# Altium PCB PCB1.PcbDoc
Units mil, origin at the board's own origin, x right, y up, seen from the top; angles counter-clockwise.
Board outline 6155 x 5830 mil, 2 copper layers (Top Layer, Bottom Layer); 66 components, 58 nets, 222 pads, 46 vias.
Unrouted connection lines stored in the file: 2.
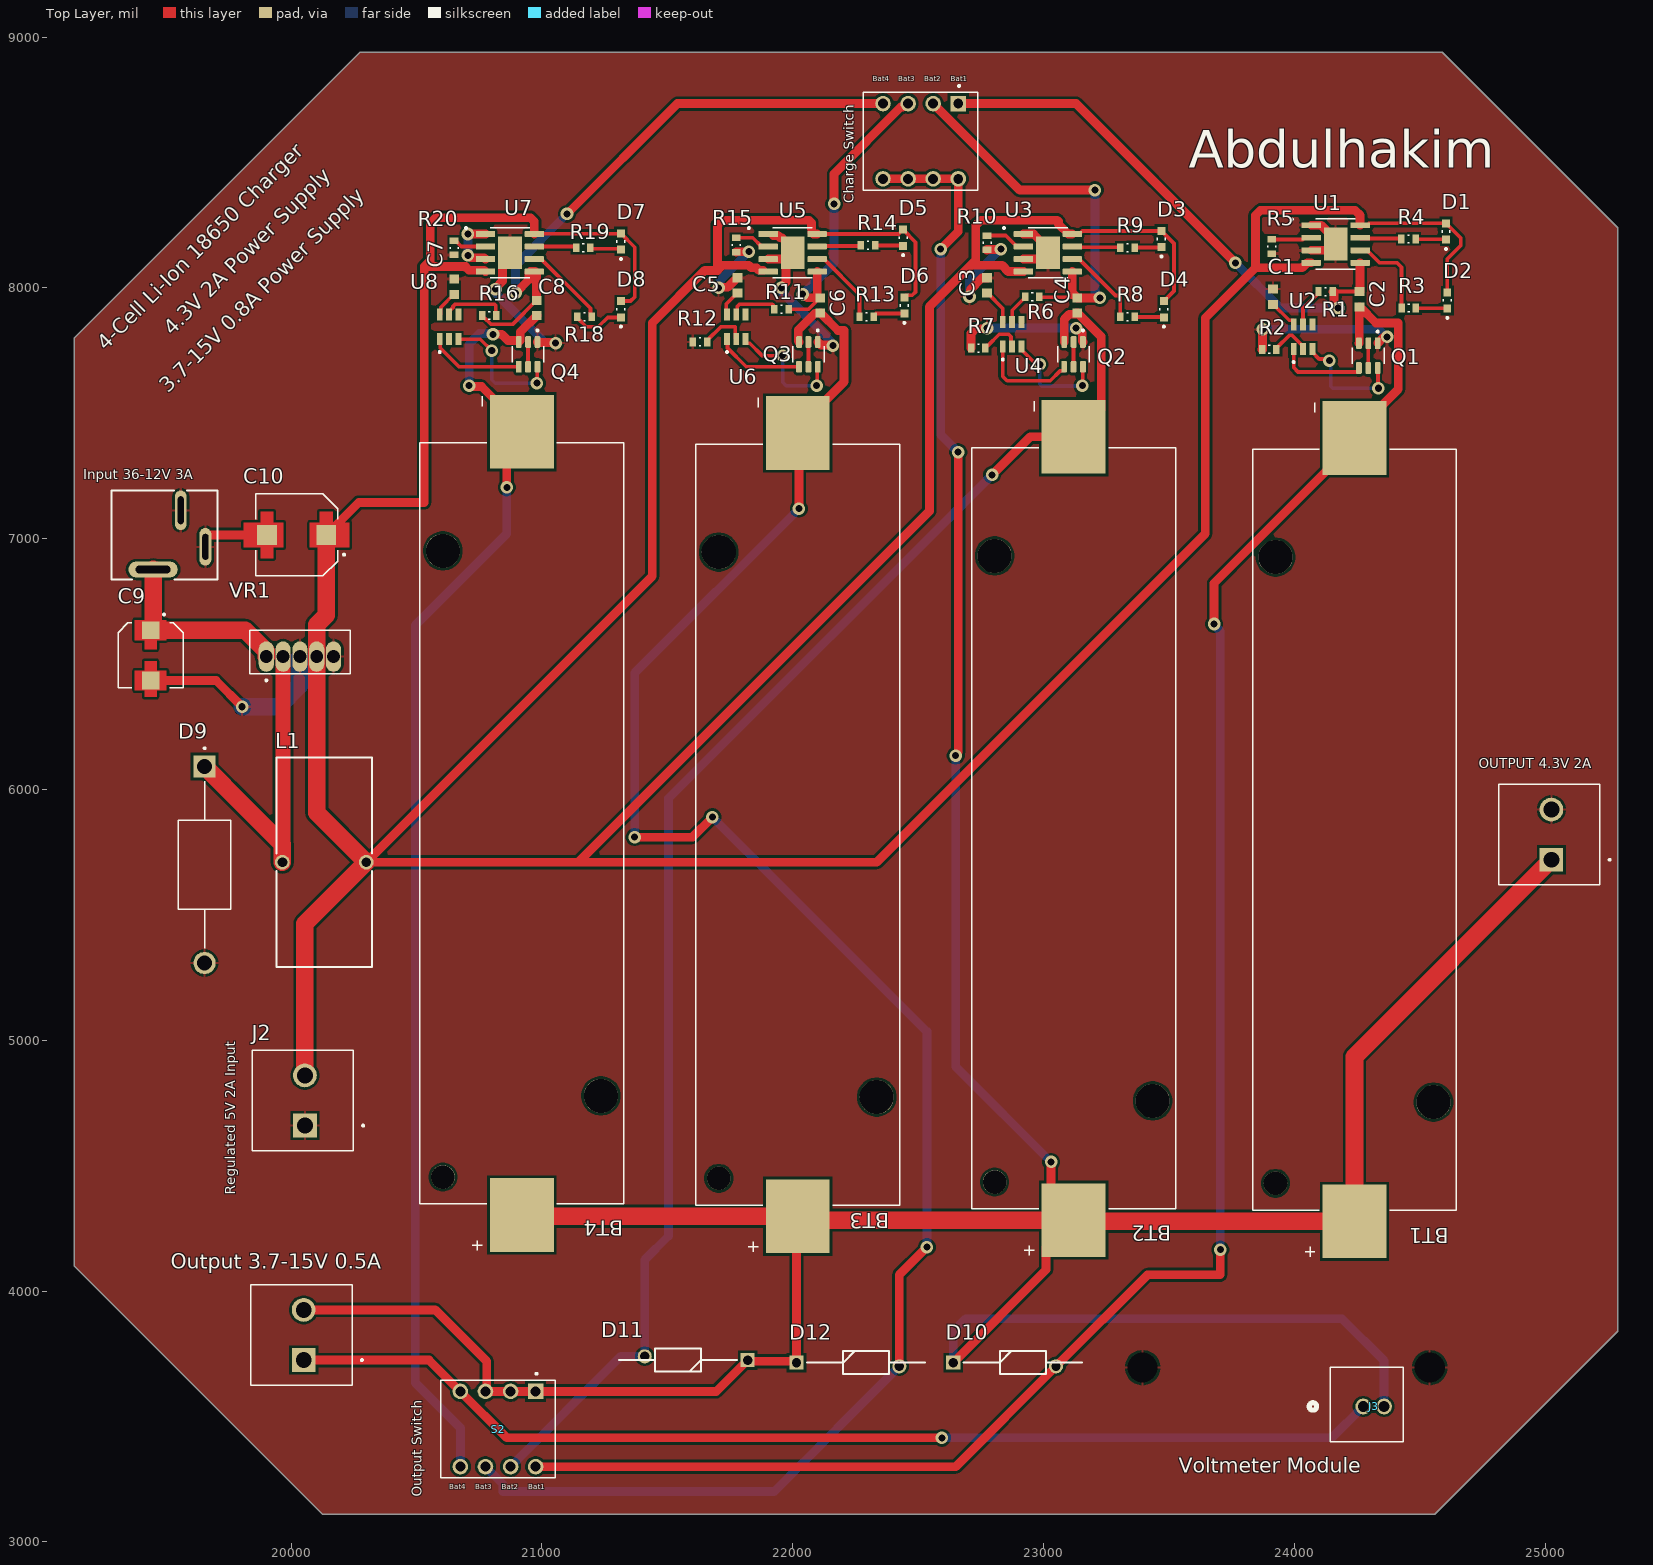
[diagram p0: Top Layer view]
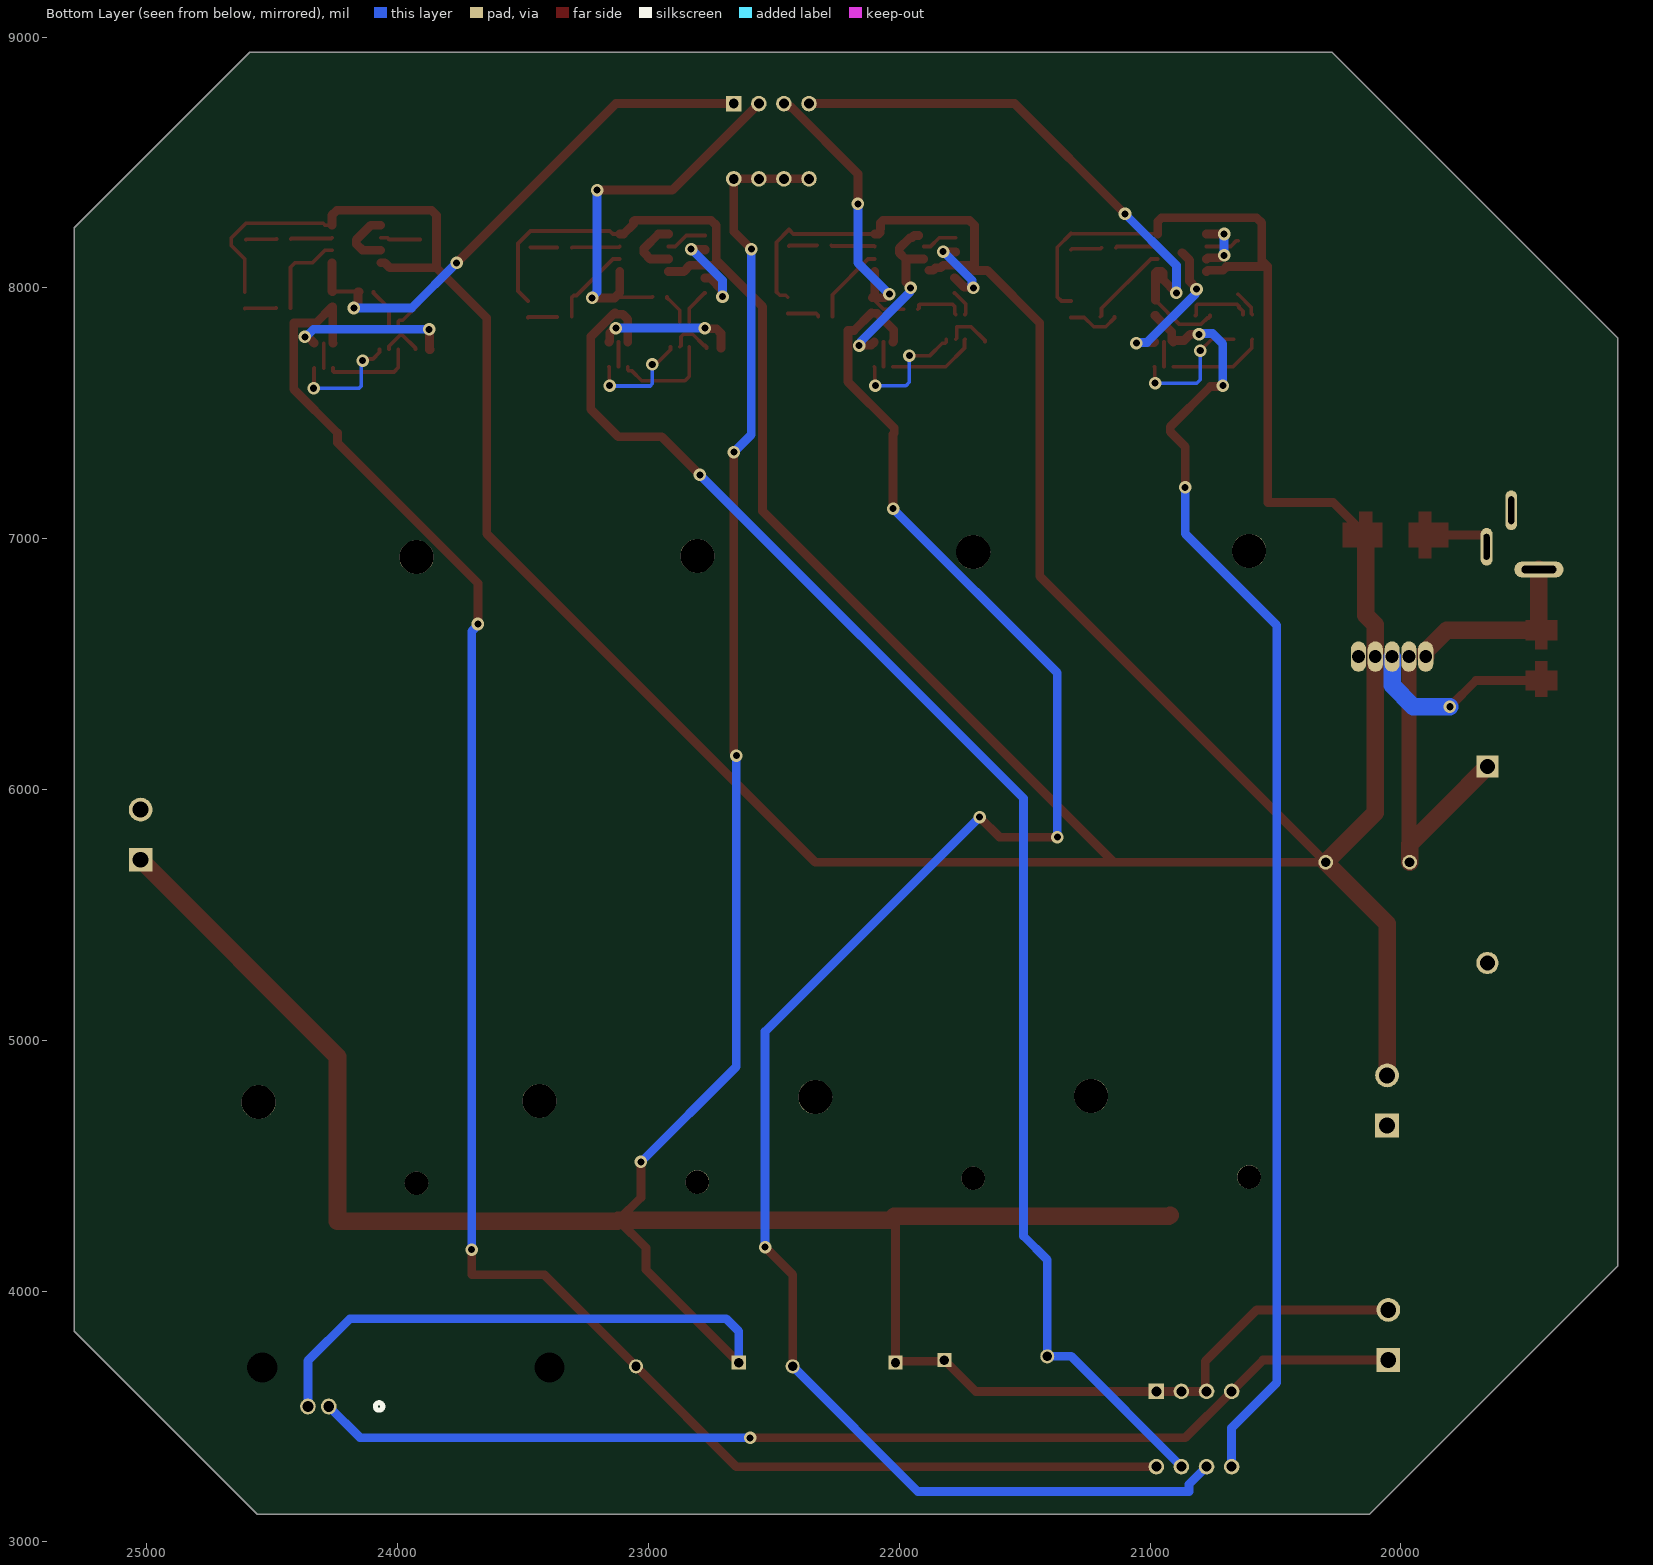
[diagram p1: Bottom Layer view, seen from below]
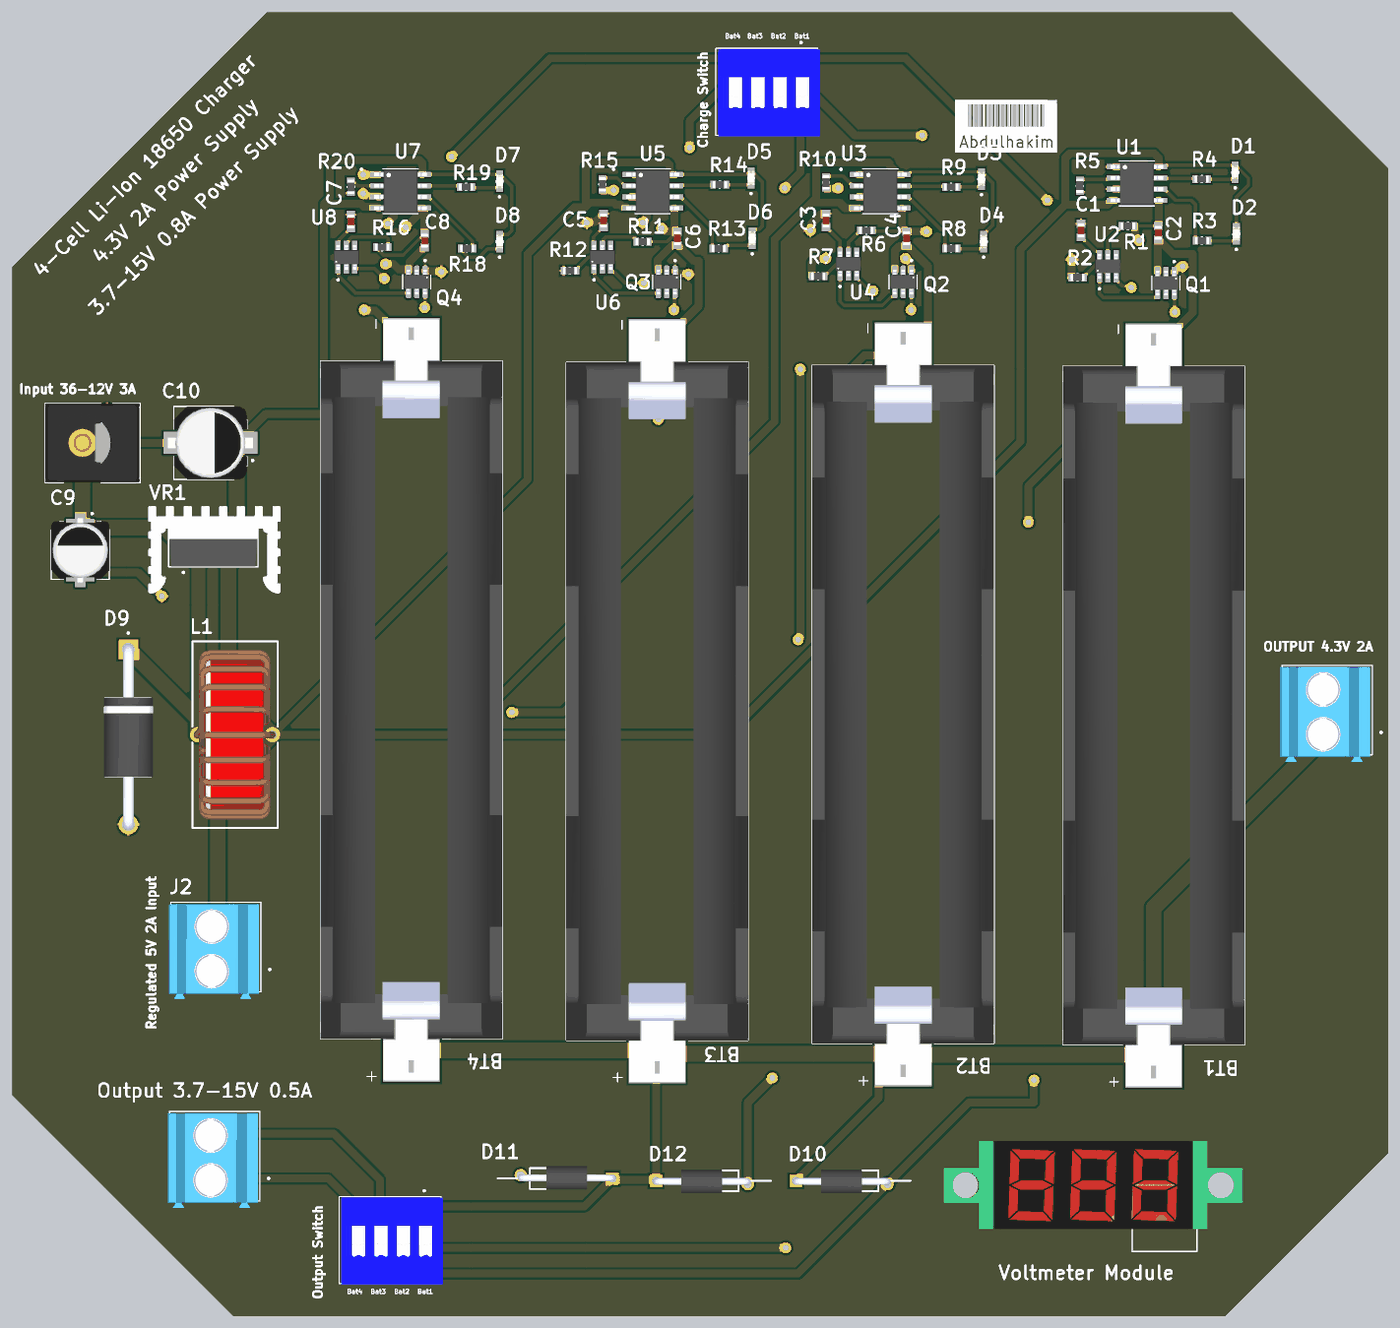
[diagram p2: 3D render of the assembled board from above, using the file's embedded part models]

## Layer stack, top to bottom
Top Solder: solder mask 0.4, Solder Resist, Dk 3.5
Top Layer: signal copper 1.4
Dielectric 1: dielectric 12.6, FR-4, Dk 4.8
Bottom Layer: signal copper 1.4
Bottom Solder: solder mask 0.4, Solder Resist, Dk 3.5

## Board outline
19135,4100 20125,3110 24560,3110 25290,3840 25290,8240 24590,8940 20275,8940 19135,7800

## Design rules (kind name [scope] priority, off if disabled: settings)
Clearance [All] p1: gap=10 ignorepadtopadclearanceinfootprint=FALSE
ComponentClearance [All] p1 off: gap=10 collisioncheckmode=3 verticalgap=10 showdistances=FALSE
PolygonConnect [All] p1: connectstyle=Relief reliefconductorwidth=10 reliefentries=4 polygonreliefangle="90 Angle" airgapwidth=10
RoutingVias [All] p1: holewidth=28 width=50 viastyle="Through Hole" minholewidth=28 minwidth=50 maxholewidth=28 maxwidth=50
SolderMaskExpansion [All] p1: expansion=4 istentingtop=FALSE
SupplyNets "Schematic Supply Nets_2" [InNet('VCC')] p1: voltage=0.000
SupplyNets "Schematic Supply Nets_1" [InNet('+5')] p2: voltage=0.000
SupplyNets "Schematic Supply Nets" [InNet('GND')] p3: voltage=0.000
Width [All] p1: maxlimit=100 minlimit=15 preferedwidth=35 minimp=50.000000 maximp=50.000000 favimp=50.000000
29 further rules are at their usual default settings.

## Classes and differential pairs
component class Sheet2: BT1 BT2 BT3 BT4 C9 C10 D9 D10 D11 D12 J1 J2 J4 J5 L1 S1 S2 Voltmeter VR1
component class Sheet1: C1 C2 C3 C4 C5 C6 C7 C8 D1 D2 D3 D4 D5 D6 D7 D8 Q1 Q2 Q3 Q4 R1 R2 R3 R4 R5 R6 R7 R8 R9 R10 R11 R12 R13 R14 R15 R16 R18 R19 R20 U1 U2 U3 U4 U5 U6 U7 U8

## Components (designator, comment, footprint, x,y, rotation, side; value= is the part's Value field where it differs from the comment)
BT1 "1042" BAT_1042 24240,5840 r270 top
BT2 "1042" BAT_1042 23120,5845 r270 top
BT3 "1042" BAT_1042 22020,5860 r270 top
BT4 "1042" BAT_1042 20920,5865 r270 top
C1 "100nF" CAPC1608X90N 23915,7965 r90 top
C2 "10uF" CAPC1608X90N 24260,7955 r90 top
C3 "100nF" CAPC1608X90N 22775,8010 r90 top
C4 "10uF" CAPC1608X90N 23135,7930 r90 top
C5 "100nF" CAPC1608X90N 21780,8010 r90 top
C6 "10uF" CAPC1608X90N 22110,7930 r90 top
C7 "100nF" CAPC1608X90N 20650,8005 r90 top
C8 "10uF" CAPC1608X90N 20980,7920 r90 top
C9 "100uF" CAP_EEEFKV101XAV 19440,6535 r270 top
C10 "1000uH" CAP_EEEFK0J102AV 20021.89,7015 r180 top
"Charge Switch" "DIP1" SW_DS01C-254-L-04BE 22510,8585 r180 top (schematic designator S1)
D1 "Red" LED_SML-D12U1WT86 24605,8225 r90 top
D2 "Green" LED_SML-D12FWT86 24610,7950 r90 top
D3 "Red" LED_SML-D12U1WT86 23470,8195 r90 top
D4 "Green" LED_SML-D12FWT86 23480,7915 r90 top
D5 "Red" LED_SML-D12U1WT86 22440,8200 r90 top
D6 "Green" LED_SML-D12FWT86 22445,7930 r90 top
D7 "Red" LED_SML-D12U1WT86 21315,8185 r90 top
D8 "Green" LED_SML-D12FWT86 21315,7915 r90 top
D9 "1N5822" DIOAD1990W125L900D530 19655,5700 r270 top
D10 "1N5819-G" DIOAD1405W75L465D235 22640,3715 r0 top
D11 "1N5819-G" DIOAD1405W75L465D235 21820,3725 r180 top
D12 "1N5819-G" DIOAD1405W75L465D235 22015,3715 r0 top
"Input 36-12V 3A" "694106402002" 694106402002 19495,7015 r90 top (schematic designator J1)
J2 "Regulated 5V" CUI_TB007-508-02BE 20055,4660 r90 top
J3 "393570002" CONN_393570002_MOL 24220,3540 r0 top (schematic designator Voltmeter)
L1 "100uH" WE-SI_744132 20132.32,5710 r0 top
"Output 3.7-15V 0.5A" "OUT 3.7-15V 0.5A" CUI_TB007-508-02BE 20050,3725 r90 top (schematic designator J4)
"OUTPUT 4.3V 2A" "OUTPUT 5V 2A" CUI_TB007-508-02BE 25025,5720 r90 top (schematic designator J5)
Q1 "FS8205" SOT95P280X145-6N#1 24295,7730 r270 top
Q2 "FS8205" SOT95P280X145-6N#1 23120,7735 r270 top
Q3 "FS8205" SOT95P280X145-6N#1 22062.6,7735 r270 top
Q4 "FS8205" SOT95P280X145-6N#1 20945,7735 r270 top
R1 "100" RES_ERJ3EKF4703V 24125,7985 r0 top
R2 "1k" RES_ERJ3EKF4703V 23900,7755 r0 top
R3 "1k" RES_ERJ3EKF4703V 24456.46,7920 r0 top
R4 "1k" RES_ERJ3EKF4703V 24455,8195 r0 top
R5 "1.2k" RES_ERJ3EKF4703V 23910,8165 r90 top
R6 "100" RES_ERJ3EKF4703V 22955,7965 r0 top
R7 "1k" RES_ERJ3EKF4703V 22740,7760 r0 top
R8 "1k" RES_ERJ3EKF4703V 23335,7885 r0 top
R9 "1k" RES_ERJ3EKF4703V 23335,8160 r0 top
R10 "1.2k" RES_ERJ3EKF4703V 22775,8180 r90 top
R11 "100" RES_ERJ3EKF4703V 21955,7915 r0 top
R12 "1k" RES_ERJ3EKF4703V 21630,7785 r0 top
R13 "1k" RES_ERJ3EKF4703V 22295,7885 r0 top
R14 "1k" RES_ERJ3EKF4703V 22300,8170 r0 top
R15 "1.2k" RES_ERJ3EKF4703V 21775,8171.46 r90 top
R16 "100" RES_ERJ3EKF4703V 20790,7890 r180 top
R18 "1k" RES_ERJ3EKF4703V 21170,7885 r180 top
R19 "1k" RES_ERJ3EKF4703V 21165,8160 r0 top
R20 "1.2k" RES_ERJ3EKF4703V 20650,8160 r90 top
S2 "DIP2" SW_DS01C-254-L-04BE 20825,3450 r180 top
U1 "TP4056" SOP127P600X175-9N 24165,8175 r0 top
U2 "DW01A" SOT95P280X145-6N#2 24035,7805 r90 top
U3 "TP4056" SOP127P600X175-9N 23017.56,8140 r0 top
U4 "DW01A" SOT95P280X145-6N#2 22875,7815 r90 top
U5 "TP4056" SOP127P600X175-9N 22000,8140 r0 top
U6 "DW01A" SOT95P280X145-6N#2 21775,7845 r90 top
U7 "TP4056" SOP127P600X175-9N 20872.44,8140 r0 top
U8 "DW01A" SOT95P280X145-6N#2 20630,7845 r90 top
VR1 "LM2576-5.0WT" TO170P1016X444X1572-5 20035,6530 r0 top

## Footprints (in the part's own frame and the unit in brackets; to place one, negate y for a bottom-side part, rotate by r counter-clockwise, add the part's x,y. Pads: shape width x height; smd on the part's side, far side on the other; paste and mask are expansions set on the pad)
694106402002 [mm] "DC Power Jack Vertical THT ?6.4"
  oval 1.6x5 hole 0.8 slot 3.5 at 90 deg: 1(-3.5,1.15)
  oval 3.8x1.2 hole 0.6 slot 2.6 at 0 deg: 2(-1.2,-4.15)
  oval 4x1.2 hole 0.6 slot 2.8 at 0 deg: 3(2.5,-1.65)
  silkscreen extent -4.5,-5.35 4.5,5.35, body extent -4.5,-5.35 4.5,5.35, height 14.1
BAT_1042 [mm]
  rect 7.46x6.47 smd: N(-39.67,0) P(39.67,0)
  round 3.45 hole 3.45 unplated: ""(-27.6,-8) ""(27.6,8)
  round 2.39 hole 2.39 unplated: ""(35.82,-8)
  silkscreen extent -43.25,-10.32 43.25,10.32, body extent -43.23,-10.33 43.23,10.33, height 14.86
CAP_EEEFK0J102AV [mm]
  rect 2x2 smd paste-2 mask+0: 1(-3,0) 2(3,0)
  Top Layer region: -2.35,1.25 -1.35,1.25 -1.35,-1.25 -2.35,-1.25 -2.35,-2.35 -3.65,-2.35 -3.65,-1.25 -5.35,-1.25 -5.35,1.25 -3.65,1.25 -3.65,2.35 -2.35,2.35
  Top Layer region: 3.65,1.25 5.35,1.25 5.35,-1.25 3.65,-1.25 3.65,-2.35 2.35,-2.35 2.35,-1.25 1.35,-1.25 1.35,1.25 2.35,1.25 2.35,2.35 3.65,2.35
  silkscreen extent -4.9,-4.15 4.15,4.15, body extent -4.85,-4.15 4.85,4.15, height 10.5
CAP_EEEFKV101XAV [mm]
  rect 1.8x1.8 smd paste-2 mask+0: 1(-2.55,0) 2(2.55,0)
  Top Layer region: -1.55,0.6 -0.6,0.6 -0.6,-0.6 -1.55,-0.6 -1.55,-1.6 -3.55,-1.6 -3.55,-0.6 -4.2,-0.6 -4.2,0.6 -3.55,0.6 -3.55,1.6 -1.55,1.6
  Top Layer region: 3.55,0.6 4.2,0.6 4.2,-0.6 3.55,-0.6 3.55,-1.6 1.55,-1.6 1.55,-0.6 0.6,-0.6 0.6,0.6 1.55,0.6 1.55,1.6 3.55,1.6
  silkscreen extent -4.25,-3.3 3.3,3.3, body extent -3.65,-3.3 3.65,3.3, height 8
CAPC1608X90N [mm]
  rect 0.92x0.98 smd: 1(-0.775,0) 2(0.775,0)
  body extent -0.8,-0.41 0.8,0.41, height 0.9
CONN_393570002_MOL [mil]
  round 63 hole 43: 1(55,0) 2(138,0)
  silkscreen extent -161,-141 214,156, body extent -919,-42 419,352, height 276
CUI_TB007-508-02BE [mm]
  rect 2.4x2.4 / inner round 2.4 / far side rect 2.4x2.4 hole 1.6: 1(0,0)
  round 2.4 hole 1.6: 2(5.08,0)
  silkscreen extent -2.54,-6 7.62,5.35, body extent -3.35,-4.66 7.41,5.59, height 14
DIOAD1405W75L465D235 [mm]
  rect 1.425x1.425 / inner round 1.425 / far side rect 1.425x1.425 hole 0.95 mask+0.102: 1(0,0)
  round 1.425 hole 0.95 mask+0.102: 2(10.414,-0.381)
  silkscreen extent 1.06,-1.18 13.04,1.18, body extent -0.37,-1.43 10.78,1.27, height 2.7
DIOAD1990W125L900D530 [mm]
  round 2.25 hole 1.5 mask+0.102: A(9.95,0)
  rect 2.25x2.25 / inner round 2.25 / far side rect 2.25x2.25 hole 1.5 mask+0.102: C(-9.95,0)
  silkscreen extent -11.9,-2.65 8.47,2.65, body extent -10.58,-2.78 10.58,2.79, height 5.6
LED_SML-D12FWT86 [mm]
  rect 0.8x0.8 smd: A(0.825,0) C(-0.825,0)
  silkscreen extent -1.86,-0.4 0.11,0.4, body extent -0.8,-0.4 0.8,0.4, height 0.55
LED_SML-D12U1WT86 [mm]
  rect 0.8x0.8 smd: A(0.825,0) C(-0.825,0)
  silkscreen extent -1.86,-0.4 0.11,0.4, body extent -0.8,-0.4 0.8,0.4, height 0.55
RES_ERJ3EKF4703V [mm]
  rect 0.65x0.9 smd: 1(-0.725,0) 2(0.725,0)
  silkscreen extent -0.08,-0.4 0.08,0.4, body extent -0.8,-0.4 0.8,0.4, height 0.45
SOP127P600X175-9N [mm]
  rrect25% 1.97x0.6 smd: 1(-2.475,1.905) 2(-2.475,0.635) 3(-2.475,-0.635) 4(-2.475,-1.905) 5(2.475,-1.905) 6(2.475,-0.635) 7(2.475,0.635) 8(2.475,1.905)
  rect 2.413x3.302 smd paste-3: 9(0,0)
  silkscreen extent -4.54,-2.55 2,2.6, body extent -3,-2.45 3,2.45, height 1.75
SOT95P280X145-6N#1 [mm]
  rrect50% 1.21x0.59 smd: 1(-1.255,0.95) 2(-1.255,0) 3(-1.255,-0.95) 4(1.255,-0.95) 5(1.255,0) 6(1.255,0.95)
  silkscreen extent -2.53,-1.6 0.8,1.6, body extent -1.4,-1.45 1.4,1.45, height 1.45
SOT95P280X145-6N#2 [mm]
  rect 1.21x0.59 smd: 1(-1.255,0.95) 2(-1.255,0) 3(-1.255,-0.95) 4(1.255,-0.95) 5(1.255,0) 6(1.255,0.95)
  silkscreen extent -2.65,0.85 -2.46,1.05, body extent -1.4,-1.45 1.4,1.45, height 1.45
SW_DS01C-254-L-04BE [mm]
  rect 1.58x1.58 / inner round 1.58 / far side rect 1.58x1.58 hole 1: 1A(-3.81,-3.81)
  round 1.58 hole 1: 1B(-3.81,3.81) 2A(-1.27,-3.81) 2B(-1.27,3.81) 3A(1.27,-3.81) 3B(1.27,3.81) 4A(3.81,-3.81) 4B(3.81,3.81)
  silkscreen extent -5.79,-5.7 5.79,4.95, body extent -6.04,-4.83 5.54,5.07, height 7.72
TO170P1016X444X1572-5 [mm]
  oval 1.54x3.08 hole 1.29: 1(-3.4,0) 2(-1.7,0) 3(0,0) 4(1.7,0) 5(3.4,0)
  silkscreen extent -5.08,-2.5 5.08,2.69, body extent -7.38,-4.83 7.62,5.17, height 16.44
WE-SI_744132 [mm]
  round 1.508 hole 1: 1(-4.25,0) 2(4.25,0)
  silkscreen extent -4.85,-10.6 4.85,10.6, body extent -4.7,-9.67 4.6,9.65, height 22.36

## Part data
BT1 BT2 BT3 BT4: "SMT Holder for 18650 Battery", Package="NON STANDARD-5 Keystone", Check_prices=https://www.snapeda.com/parts/1042/Keystone/view-part/?ref=eda, MF="Keystone Electronics Corp.", MP=1042, SnapEDA_Link=https://www.snapeda.com/parts/1042/Keystone/view-part/?ref=snap
C1 C2 C3 C4 C5 C6 C7 C8: library part 0603YC104KAZ2A, "Capacitor MLCC 0603 100nF 16V", Package="1608 AVX", Check_prices=https://www.snapeda.com/parts/0603YC104KAZ2A/AVX/view-part/?ref=eda, MF=AVX, MP=0603YC104KAZ2A, SnapEDA_Link=https://www.snapeda.com/parts/0603YC104KAZ2A/AVX/view-part/?ref=snap
C9: library part EEEFKV101XAV, "CAP ALUM 100UF 20% 35V SMD", Package="RADIAL-2 Panasonic", Availability="In Stock", Check_prices=https://www.snapeda.com/parts/EEEFKV101XAV/Panasonic/view-part/?ref=eda, MF=Panasonic, MP=EEEFKV101XAV, Price=None, Purchase-URL=https://pricing.snapeda.com/search/part/EEEFKV101XAV/?ref=eda, SnapEDA_Link=https://www.snapeda.com/parts/EEEFKV101XAV/Panasonic/view-part/?ref=snap
C10: library part EEEFK0J102AV, "CAP ALUM 1000UF 20% 6.3V SMD", Package="RADIAL-2 Panasonic", Availability="In Stock", Check_prices=https://www.snapeda.com/parts/EEEFK0J102AV/Panasonic/view-part/5793315/?ref=eda, MF=Panasonic, MP=EEEFK0J102AV, Price=None, Purchase-URL=https://pricing.snapeda.com/search/part/EEEFK0J102AV/?ref=eda, SnapEDA_Link=https://www.snapeda.com/parts/EEEFK0J102AV/Panasonic/view-part/5793315/?ref=snap
"Charge Switch" S2: library part DS01C-254-L-04BE, "4 Position, Through Hole, 2.54 mm Pitch, Raised Slide Actuator, Convex Bottom, Long Pin, DIP Switch", Package=None, Check_prices=https://www.snapeda.com/parts/DS01C-254-L-04BE/Same+Sky/view-part/?ref=eda, MF="Same Sky", MP=DS01C-254-L-04BE, SnapEDA_Link=https://www.snapeda.com/parts/DS01C-254-L-04BE/Same+Sky/view-part/?ref=snap
D1 D3 D5 D7: library part SML-D12U1WT86, "Red 620nm LED Indication - Discrete 2.2V 0603 (1608 Metric)", Package="0603 Rohm", Availability="In Stock", Check_prices=https://www.snapeda.com/parts/SML-D12U1WT86/Rohm/view-part/?ref=eda, MF=Rohm, MP=SML-D12U1WT86, Price=None, Purchase-URL=https://pricing.snapeda.com/search?q=SML-D12U1WT86&ref=eda, SnapEDA_Link=https://www.snapeda.com/parts/SML-D12U1WT86/Rohm/view-part/?ref=snap
D2 D4 D6 D8: library part SML-D12FWT86, "Green 565nm LED Indication - Discrete 2.2V 0603 (1608 Metric)", Package="0603 Rohm", Availability="In Stock", Check_prices=https://www.snapeda.com/parts/SML-D12FWT86/Rohm/view-part/?ref=eda, MF=Rohm, MP=SML-D12FWT86, Price=None, Purchase-URL=https://pricing.snapeda.com/search/part/SML-D12FWT86/?ref=eda, SnapEDA_Link=https://www.snapeda.com/parts/SML-D12FWT86/Rohm/view-part/?ref=snap
D9: "3A, 40V, DÃ¼zlemsel Schottky", Package="DO-201AD Taiwan Semiconductor", Check_prices=https://www.snapeda.com/parts/1N5822/taiwan/view-part/?ref=eda, MF="Taiwan Semiconductor", MP=1N5822, SnapEDA_Link=https://www.snapeda.com/parts/1N5822/taiwan/view-part/?ref=snap
D10 D11 D12: "Diode,Schottky Barrier,Vr 40V,If 1A,Pkg CASE 59-10,Vf 0.6V,Tj +125degc,Cs 25A", Package="DO-41 onsemi", Check_prices=https://www.snapeda.com/parts/1N5819G/Onsemi/view-part/?ref=eda, MF="ON Semiconductor", MP=1N5819G, SnapEDA_Link=https://www.snapeda.com/parts/1N5819G/Onsemi/view-part/?ref=snap
"Input 36-12V 3A": library part CMP-1502-00189-3, "DC Power Jack Connector WR-DC, Male, Vertical, THT, 3 A, 20 V", Color=Black, Current Rating=3A, Flammability Rating="UL94 V-0", Insulation Resistance=100MΩ, Max Operating Temperature=85°C, Min Operating Temperature=-40°C, Operating Supply Voltage=20V, Voltage Rating=30V, Connector Type=Power, Contact Gender=Female, Contact Material=Gold, Contact Plating=Tin, Gender=Male, Height=14.3mm, Housing Material=Polyamide, Mount="Through Hole", Number of Contacts=1, Orientation=Vertical, Packaging=Bulk, REACH SVHC=Unknown, RoHS=Compliant, Shielding=Unshielded, Termination="Through Hole", Voltage Rating (DC)=20V
J2: library part TB007-508-02BE, "2 Position Wire to Board Terminal Block Horizontal with Board 0.200 (5.08mm) Through Hole", Package=None, Check_prices=https://www.snapeda.com/parts/TB00750802BE/Same+Sky/view-part/?ref=eda, MF="Same Sky", MP=TB00750802BE, SnapEDA_Link=https://www.snapeda.com/parts/TB00750802BE/Same+Sky/view-part/?ref=snap
J3: "TB, WIRE TO BRD, 2POS, 16AWG; Pitch Spacing:3.5mm; No. of Positions:2Ways; Wire Size AWG Min:28AWG; Wire Size AWG Max:16AWG; Conductor Area CSA:1mmÂ²; Wire Connection Method:Screw; Rated Current:17.5A; Rated Voltage:300V; Block Orientation:Through Hole Ri", Package=None, Check_prices=https://www.snapeda.com/parts/393570002/Molex/view-part/?ref=eda, MF=Molex, MP=393570002, SnapEDA_Link=https://www.snapeda.com/parts/393570002/Molex/view-part/?ref=snap
L1: library part WE-SI, "L = 49 ÂµH ; IR = 5.8 A; Isat = 2.2 A; RDC = 0.05 â„", Package=None, Check_prices=https://www.snapeda.com/parts/744132/Wurth+Electronics/view-part/?ref=eda, MF="Wurth Elektronik", MP=744132, SnapEDA_Link=https://www.snapeda.com/parts/744132/Wurth+Electronics/view-part/?ref=snap
"Output 3.7-15V 0.5A" "OUTPUT 4.3V 2A": library part TB007-508-02BE, "2~24 Poles, Screw Type, Horizontal, 5.08 Pitch, 24~12 (AWG), Terminal Block Connector", Package=None, Check_prices=https://www.snapeda.com/parts/TB007-508-02BE/Same+Sky/view-part/?ref=eda, MF="Same Sky", MP=TB007-508-02BE, SnapEDA_Link=https://www.snapeda.com/parts/TB007-508-02BE/Same+Sky/view-part/?ref=snap
Q1 Q2 Q3 Q4: "ÐœÐžÐŸ-Ñ‚Ñ€Ð°Ð½Ð·Ð¸ÑÑ‚Ð¾Ñ€ Ñ Ð´Ð²Ð¾Ð¹Ð½Ñ‹Ð¼ N-ÐºÐ°Ð½Ð°Ð»ÑŒÐ½Ñ‹Ð¼ Ñ€ÐµÐ¶Ð¸Ð¼Ð¾Ð¼ ÑƒÑÐ¸Ð»ÐµÐ½Ð¸Ñ Ð¼Ð¾Ñ‰Ð½Ð¾ÑÑ‚Ð¸", Package=Package, Check_prices=https://www.snapeda.com/parts/FS8205/Fortune+Semiconductor/view-part/?ref=eda, MF="Fortune Semiconductor", MP=FS8205, SnapEDA_Link=https://www.snapeda.com/parts/FS8205/Fortune+Semiconductor/view-part/?ref=snap
R1 R2 R3 R4 R5 R6 R7 R8 R9 R10 R11 R12 R13 R14 R15 R16 R18 R19 R20: library part ERJ3EKF4703V, "RES, THICK FILM, 470K, 100mW, 1%, 0603RES, THICK FILM, 470K, 100mW, 1%, 0603, FULL REEL", Package="1608-2 Panasonic", Check_prices=https://www.snapeda.com/parts/ERJ-3EKF4703V/Panasonic+Electronic+Components/view-part/?ref=eda, MF=Panasonic, MP=ERJ-3EKF4703V, SnapEDA_Link=https://www.snapeda.com/parts/ERJ-3EKF4703V/Panasonic+Electronic+Components/view-part/?ref=snap
U1 U3 U5 U7: "Complete single cell Li-Ion battery with a constant current / constant voltage linear charger", Package=Package, Availability="Not in stock", Check_prices=https://www.snapeda.com/parts/TP4056/NanJing+Top+Power+ASIC+Corp./view-part/?ref=eda, MF="NanJing Top Power ASIC Corp.", MP=TP4056, Price=None, SnapEDA_Link=https://www.snapeda.com/parts/TP4056/NanJing+Top+Power+ASIC+Corp./view-part/?ref=snap
U2 U4 U6 U8: "One Cell Lithium-ion/Polymer Battery Protection IC", Package="SOT-23-6 Fortune Semiconductor", Check_prices=https://www.snapeda.com/parts/DW01A/Fortune+Semiconductor/view-part/?ref=eda, MF="Fortune Semiconductor", MP=DW01A, SnapEDA_Link=https://www.snapeda.com/parts/DW01A/Fortune+Semiconductor/view-part/?ref=snap
VR1: "Buck Switching Regulator IC Positive Fixed 5V 1 Output 3A TO-220-5", Package="TO-220-5 Micrel", Check_prices=https://www.snapeda.com/parts/LM2576-5.0WT/Microchip/view-part/?ref=eda, MF="Microchip Technology", MP=LM2576-5.0WT, SnapEDA_Link=https://www.snapeda.com/parts/LM2576-5.0WT/Microchip/view-part/?ref=snap

## Free pads (board coordinates)
  round 60 hole 120: 2(24540,3695) 3(23395,3695)

## Via types
v1: diameter 50, hole 28, Top Layer to Bottom Layer, 46 vias

## Nets (pads, with @x,y where several pads share a name; then routed paths per layer and width w, separated by ;. In a path a pad name is that pad's centre, name@x,y a point inside that pad or via, vN(x,y) a via of type N, cw(c..) or ccw(c..) an arc to the next point about the centre after c; other vN are vias at no path point)
+5: C10.1 D1.A D2.A D3.A D4.A D5.A D6.A D7.A D8.A J2.2 L1.2 U1.4 U1.8 U3.4 U3.8 U5.4 U5.8 U7.4 U7.8 VR1.4 | length 20938.7
  Top Layer w15: U7.8 20971.12,8216.24 21313.76,8216.24 D7.A 21370,8162.48 21370,7963.79 21353.69,7947.48 D8.A ; U5.8 22422.52,8215 D5.A 22490,8182.48 22490,7983.79 22476.94,7970.73 22453.25,7970.73 D6.A ; U3.8 23141.97,8215 23154.45,8227.48 D3.A 23520,8177.48 23520,7987.48 D4.A ; U1.8 24289.41,8250 24296.89,8257.48 D1.A 24663.79,8198.69 24663.79,8168.79 24610,8115 D2.A
  Top Layer w35: C10.1 20269.5,7144.5 20530.5,7144.5 20530.5,8085 ; U7.4 20769.31,8070.69 20709.31,8070.69 20695,8085 20530.5,8085 ; U7.8 20969.88,8264.88 20954.76,8280 20575.5,8280 20555,8259.5 20555,8109.5 20530.5,8085 ; 21145,5710 22545,7110 22545,7925 22710,8090 ; U5.4@21881.28,8070.69 21864.71,8070.69 21855.4,8080 21835,8080 21825,8090 21720,8090 21700,8070 ; U5.8 22081.85,8215 22076.16,8220.69 22076.16,8236.28 22075,8237.44 22075,8259.5 22064.5,8270 21720.5,8270 21700,8249.5 21700,8070 ; U3.4 22860,8065 22835,8090 22710,8090 ; U3.8 23099.41,8215 23060,8254.41 23060,8264.5 23054.5,8270 22750.5,8270 22730,8249.5 22730,8110 22710,8090 ; U1.4 24051.97,8100 24031.97,8080 23845,8080 ; U1.8 24262.44,8289.5 24241.94,8310 23865.5,8310 23845,8289.5 23845,8080 ; 21700,8070 21650,8070 21440,7860 21440,6850.35 L1.2 22335,5710 23645,7020 23645,7880 23845,8080
  Top Layer w70: J2.2 20055,5465.35 L1.2 20101.93,5907.72 VR1.4 20101.93,6656.93 20140,6695 C10.1
B1-: BT1.N C2.1 D10.2 Q1.3 S2.1B | length 7483.8
  Top Layer w35: S2.1B 22650,3300 D10.2 23415,4065 23704.5,4065 23704.5,4164.5 v1(23705,4165) ; v1(23680,6660) 23680,6822.32 24240,7382.32 BT1.N 24240,7421.3 24414.5,7595.8 24414.5,7860 24325.67,7860 24261.18,7924.49 C2.1 24259.41,7924.49 24258.8,7923.88 24258.8,7780.61 Q1.3
  Bottom Layer w35: v1(23680,6660) 23680,6655.94 23705,6630.94 v1(23705,4165)
B2-: BT2.N C4.1 D11.2 Q2.3 S2.2B | length 5924.8
  Top Layer w35: v1(22795,7255) 22946.81,7406.81 BT2.N 23229.86,7516.67 23229.86,7805.81 23136.79,7898.88 23135.61,7898.88 C4.1 23133.82,7899.49 23129.33,7895 23103.1,7895 23082.6,7874.5 Q2.3
  Bottom Layer w35: S2.2B 21315,3740 D11.2 21410,4125 21505,4220 21505,5965 v1(22795,7255)
B3-: BT3.N C6.1 D12.2 Q3.3 S2.3B | length 7506.8
  Top Layer w35: v1(21370,5810) 21600,5810 v1(21680,5890) ; v1(22025,7120) 22025,7416.81 BT3.N 22020,7441.3 22205,7626.3 22205,7830 22180.67,7830 22111.18,7899.49 C6.1 22109.39,7898.88 22088.88,7898.88 22022.1,7832.1 22022.1,7787.5 Q3.3 ; D12.2 22425,4065 v1(22535,4175)
  Bottom Layer w35: S2.3B 20845,3230 20845,3200.5 21925.5,3200.5 D12.2 ; v1(21370,5810) 21370,6465 v1(22025,7120) ; v1(21680,5890) 22535,5035 v1(22535,4175)
B4-: BT4.N C8.1 Q4.3 S2.4B | length 5206.3
  Top Layer w35: v1(20710,7610) 20712.87,7607.13 20759.17,7607.13 20920,7446.3 BT4.N 20860,7366.81 v1(20860,7205) ; v1(20805,7815) 20840,7815 20864.27,7790.73 20901.71,7790.73 20907.6,7784.84 Q4.3 20913.48,7790.3 20913.48,7824.15 20978.82,7889.49 C8.1
  Bottom Layer w35: S2.4B 20675,3455 20495,3635 20495,6655 20860,7020 v1(20860,7205) ; v1(20710,7610) 20710,7777.37 20750.5,7817.87 20802.13,7817.87 v1(20805,7815)
Batt1: "Charge Switch.1A" C2.2 R1.2 U1.5 | length 2152
  Top Layer w15: R1.2 24153.8,7985.26 24259.74,7985.26 C2.2
  Top Layer w35: 22660,8735 23130,8735 v1(23765,8100) ; R1.2 24158.03,7985 24158.25,7984.78 24158.25,7940.81 24175,7924.06 v1(24175,7920) ; C2.2 24261.18,7985.51 24262.44,7986.77 U1.5
  Bottom Layer w35: v1(23765,8100) 23945,7920 v1(24175,7920)
Batt2: "Charge Switch.2A" C4.2 R6.2 U3.5 | length 1575.4
  Top Layer w15: R6.2 22985.79,7962.76 C4.2@23132.76,7962.76
  Top Layer w35: 22560,8735 22905,8390 v1(23205,8390) ; U3.5 23115,7980.51 C4.2@23132.76,7962.76 ; C4.2@23135.51,7960 v1(23225,7960)
  Bottom Layer w35: v1(23205,8390) 23205,7984.06 23225,7964.06 v1(23225,7960)
Batt3: "Charge Switch.3A" C6.2 R11.2 U5.5 | length 1269.2
  Top Layer w15: R11.2 22063.31,7915 C6.2@22108.82,7960.51
  Top Layer w35: v1(22040,7975) 22044.06,7975 22057.94,7961.12 22108.21,7961.12 22097.44,7971.89 U5.5 ; v1(22165,8335) 22165,8455 22431.4,8721.4 22439.04,8721.4 22452.64,8735 22460,8735
  Bottom Layer w35: v1(22040,7975) 22165,8100 v1(22165,8335)
Batt4: "Charge Switch.4A" C8.2 R16.2 U7.5 | length 2362.3
  Top Layer w15: R16.2 20761.46,7885.08 20766.75,7879.78 20771.67,7879.78 20796.46,7855 20885,7855 20885,7856.69 C8.2@20978.82,7950.51
  Top Layer w35: v1(20895,7980) 20948.6,8033.6 20948.6,8059.31 20954.29,8065 U7.5 20972.52,8065 20978.21,8059.31 20978.21,7951.12 C8.2@20978.82,7950.51 ; v1(21100,8295) 21540,8735 22360,8735
  Bottom Layer w35: v1(20895,7980) 20895,8090 v1(21100,8295)
BV2: "Charge Switch.1B" "Charge Switch.2B" "Charge Switch.3B" "Charge Switch.4B" "Output 3.7-15V 0.5A.2" "OUTPUT 4.3V 2A.1" BT1.P BT2.P BT3.P BT4.P D10.1 D11.1 D12.1 J3.2 S2.1A S2.2A S2.3A | length 15476.4
  Top Layer w35: 20050,3925 20575,3925 20780,3720 20780,3605 S2.3A S2.2A S2.1A 21695,3600 D11.1 21825,3720 22010,3720 D12.1 22015,4263.19 BT3.P@22035,4283.19 ; 22360,8435 22460,8435 22560,8435 22660,8435 22660,8225 v1(22590,8155) ; D10.1 23010.14,4085.14 23010.14,4173.33 BT2.P 23030,4373.19 v1(23030,4515) ; v1(22650,6135) 22650,6139.06 22660,6149.06 v1(22660,7345)
  Top Layer w70: BT4.P 20925,4298.19 BT3.P ; BT3.P@22035,4283.19 BT2.P 23125,4278.19 BT1.P 24240,4935 25025,5720
  Bottom Layer w35: v1(22590,8155) 22590,7415 v1(22660,7345) ; D10.1 22640,3840 22690,3890 24190,3890 24358,3722 J3.2 ; v1(22650,6135) 22650,4895 v1(23030,4515)
GND: "Input 36-12V 3A.2" "Input 36-12V 3A.3" "OUTPUT 4.3V 2A.2" C1.2 C3.2 C5.2 C7.2 C9.2 C10.2 D9.A J2.1 pad.2 pad.3 Q1.1 Q2.1 Q3.1 Q4.1 R2.1 R5.1 R7.1 R10.1 R12.1 R15.1 R20.1 U1.1 U1.3 U1.9 U3.1 U3.3 U3.9 U5.1 U5.3 U5.9 U7.1 U7.3 U7.9 VR1.3 VR1.5 | length 5057.6
  Top Layer w35: C9.2 19700.39,6434.61 v1(19805,6330) ; 19658.39,6967.76 19658.39,7009.34 19664.04,7015 C10.2 ; v1(20705,8130) 20709.06,8130 20718.37,8120.69 20769.31,8120.69 U7.3 ; v1(20705,8215) U7.1 ; v1(20815,7995) 20815,7999.06 20842.44,8026.5 20842.44,8110 U7.9 ; Q4.1 20984.61,7782.2 21052.79,7782.2 v1(21055,7780) ; v1(21705,8000) 21707.87,8002.87 21741.18,8002.87 21778.82,8040.51 C5.2 ; R15.1 21775,8143.74 21775.22,8143.96 21823.96,8143.96 v1(21825,8145) ; U5.3 U5.9@21975,8115 ; U5.1@21923.84,8209.31 21940.41,8209.31 21949.72,8200 21957.5,8200 22000,8157.5 U5.9 21973.44,8113.44 21973.44,8022.5 21955,8004.06 v1(21955,8000) ; Q3.1 22100,7783.98 22105.89,7778.09 22106.32,7778.09 22111.54,7772.87 22157.13,7772.87 v1(22160,7770) ; v1(22705,7965) 22707.87,7967.87 22707.87,7992.87 22754.9,8039.9 22774.39,8039.9 C3.2 ; R7.1 22711.46,7819.5 22729.09,7837.13 22772.13,7837.13 v1(22775,7840) ; R10.1 22775,8153.01 22775.22,8153.23 22828.23,8153.23 v1(22830,8155) ; U3.3 22992.56,8115 U3.9 23017.56,8157.5 22960.06,8215 U3.1 ; v1(23130,7840) 23134.06,7840 23154.06,7820 23154.06,7787.75 Q2.1 ; R2.1 23873.01,7755 23873.23,7755.22 23873.23,7833.23 v1(23875,7835) ; U1.3 24140,8150 U1.9 24165,8192.5 24107.5,8250 U1.1 ; Q1.1 24332.4,7779.84 24354.69,7802.13 24367.13,7802.13 v1(24370,7805)
  Bottom Layer w35: v1(20705,8130) v1(20705,8215) ; v1(20815,7995) 20817.87,7992.13 20817.87,7977.13 21012.13,7782.87 21052.13,7782.87 v1(21055,7780) ; v1(21705,8000) 21710,8005 21710,8030 v1(21825,8145) ; v1(21955,8000) 21957.87,7997.13 21957.87,7982.13 22152.5,7787.5 22152.5,7781.56 22160,7774.06 v1(22160,7770) ; v1(22705,7965) 22705,8030 v1(22830,8155) ; v1(22775,7840) v1(23130,7840) ; v1(23875,7835) 24335.94,7835 24365.94,7805 v1(24370,7805)
  Bottom Layer w70: v1(19805,6330) 19950,6330 20035,6415 VR1.3
NetC1_1: C1.1 U2.6 | length 122.9
  Top Layer w15: C1.1 23916.18,7934.49 23979.94,7870.73 23993.48,7870.73 23997.6,7866.61 U2.6
NetC3_1: C3.1 U4.6 | length 141.7
  Top Layer w15: C3.1 22776.18,7979.49 22837.6,7918.07 U4.6
NetC5_1: C5.1 U6.6 | length 105.5
  Top Layer w15: U6.6 21735,7897.01 21735,7935.67 21778.82,7979.49 C5.1
NetC7_1: C7.1 U8.6 | length 104.5
  Top Layer w15: U8.6 20596.71,7898.52 20596.71,7922.38 20648.82,7974.49 C7.1
NetD1_C: D1.C R4.2 | length 122.5
  Top Layer w15: R4.2 24484.78,8193.76 24603.76,8193.76 D1.C
NetD2_C: D2.C R3.2 | length 126
  Top Layer w15: R3.2 24486.24,7918.76 24608.76,7918.76 D2.C
NetD3_C: D3.C R9.2 | length 107.5
  Top Layer w15: R9.2 23364.8,8161.26 23468.74,8161.26 D3.C
NetD4_C: D4.C R8.2 | length 117.5
  Top Layer w15: R8.2 23364.78,7883.76 23478.76,7883.76 D4.C
NetD5_C: D5.C R14.2 | length 112.5
  Top Layer w15: R14.2 22329.78,8168.76 22438.76,8168.76 D5.C
NetD6_C: D6.C R13.2 | length 129.5
  Top Layer w15: R13.2 22323.54,7889.92 22331.14,7897.52 D6.C
NetD7_C: D7.C R19.2 | length 124.6
  Top Layer w15: R19.2 21197.28,8156.26 21311.26,8156.26 D7.C
NetD8_C: D8.C R18.2 | length 208.5
  Top Layer w15: R18.2 21141.46,7880.08 21176.53,7845 21225,7845 21262.52,7882.52 D8.C
NetD9_C: D9.C L1.1 VR1.2 | length 1331.4
  Top Layer w60: L1.1 19968.07,5713.07 VR1.2
  Top Layer w70: D9.C 19814.65,5932.09 19965,5781.73 L1.1
NetJ3_1: "Output 3.7-15V 0.5A.1" J3.1 S2.4A | length 4405.2
  Top Layer w35: 20050,3725 20550,3725 S2.4A 20860,3415 v1(22595,3415)
  Bottom Layer w35: v1(22595,3415) 24150,3415 J3.1
NetQ1_2: Q1.2 Q1.5 | length 98.8
  Top Layer w15: Q1.5 Q1.2
NetQ1_4: Q1.4 U2.1 | length 353.6
  Top Layer w15: U2.1 23997.6,7682.4 24015,7665 24253.48,7665 24257.6,7669.11 Q1.4
NetQ1_6: Q1.6 U2.3 | length 472.2
  Top Layer w15: U2.3 24072.4,7743.39 24099.09,7716.7 24133.3,7716.7 v1(24140,7710) ; Q1.6 24333.7,7679.29 24333.7,7601.3 v1(24335,7600)
  Bottom Layer w15: v1(24140,7710) 24145,7705 24145,7608.79 24153.79,7600 v1(24335,7600)
NetQ2_2: Q2.2 Q2.5 | length 98.8
  Top Layer w15: Q2.5 Q2.2
NetQ2_4: Q2.4 U4.1 | length 400.6
  Top Layer w15: U4.1 22837.6,7647.4 22855,7630 23027.01,7630 23066.28,7669.27 23078.48,7669.27 23082.6,7673.39 Q2.4
NetQ2_6: Q2.6 U4.3 | length 437.1
  Top Layer w15: U4.3 22912.4,7753.39 22964.09,7701.7 22978.3,7701.7 v1(22985,7695) ; v1(23155,7610) 23156.2,7611.2 23156.2,7684.39 Q2.6
  Bottom Layer w15: v1(22985,7695) 22985,7617.63 22993.79,7608.85 23153.85,7608.85 v1(23155,7610)
NetQ3_2: Q3.2 Q3.5 | length 98.8
  Top Layer w15: Q3.5 Q3.2
NetQ3_4: Q3.4 U6.1 | length 352.6
  Top Layer w15: U6.1 21739.63,7793.56 21739.63,7760.37 21814.41,7685.59 Q3.4
NetQ3_6: Q3.6 U6.3 | length 506.5
  Top Layer w15: U6.3 21812.4,7783.39 21816.52,7779.27 21828.72,7779.27 21877.99,7730 v1(21960,7730) ; v1(22095,7610) 22097.5,7612.5 22097.5,7683.09 Q3.6
  Bottom Layer w15: v1(21960,7730) 21960,7623.79 21973.79,7610 v1(22095,7610)
NetQ4_2: Q4.2 Q4.5 | length 98.8
  Top Layer w15: Q4.5 Q4.2
NetQ4_4: Q4.4 U8.1 | length 380
  Top Layer w15: U8.1 20594.63,7793.56 20594.63,7760.37 20669.41,7685.59 Q4.4
NetQ4_6: Q4.6 U8.3 | length 520
  Top Layer w15: U8.3 20754.41,7795.59 v1(20800,7750) ; v1(20980,7620) 20981.2,7621.2 20981.2,7684.39 Q4.6
  Bottom Layer w15: v1(20800,7750) 20800,7633.79 20813.79,7620 v1(20980,7620)
NetR1_1: R1.1 U2.5 | length 156
  Top Layer w15: U2.5 24035,7918.62 24096.46,7980.08 R1.1
NetR2_2: R2.2 U2.2 | length 162.5
  Top Layer w15: R2.2 23928.54,7759.92 23979.5,7810.87 23991.92,7810.87 24035,7767.79 U2.2
NetR3_1: R3.1 U1.6 | length 355.7
  Top Layer w15: U1.6 24289.41,8150 24339.41,8100 24410,8100 24427.91,8082.09 R3.1
NetR4_1: R4.1 U1.7 | length 166.1
  Top Layer w15: U1.7 24264.94,8197.5 24423.96,8197.5 R4.1
NetR5_2: R5.2 U1.2 | length 160.2
  Top Layer w15: R5.2 24034.14,8193.54 24040.59,8200 U1.2
NetR6_1: R6.1 U4.5 | length 123.1
  Top Layer w15: U4.5 22875,7910.73 22919.05,7954.78 22921.16,7954.78 22926.46,7960.08 R6.1
NetR7_2: R7.2 U4.2 | length 173.5
  Top Layer w15: R7.2 22768.54,7764.92 22773.84,7770.22 22778.76,7770.22 22823.54,7815 22861.21,7815 22870.89,7805.33 22870.89,7769.7 U4.2
NetR8_1: R8.1 U3.6 | length 331.4
  Top Layer w15: U3.6 23141.97,8115 23286.97,7970 23297.67,7970 23306.46,7961.21 R8.1
NetR9_1: R9.1 U3.7 | length 193.5
  Top Layer w15: U3.7 23117.5,8162.5 23303.96,8162.5 R9.1
NetR10_2: R10.2 U3.2 | length 163.2
  Top Layer w15: R10.2 22849.61,8208.54 22893.15,8165 U3.2
NetR11_1: R11.1 U6.5 | length 199.3
  Top Layer w15: U6.5 21779.11,7898.52 21779.11,7926.21 21787.9,7935 21917.67,7935 21921.16,7931.51 21921.16,7920.3 R11.1
NetR12_2: R12.2 U6.2 | length 191.4
  Top Layer w15: R12.2 21658.54,7789.92 21713.62,7845 21771.21,7845 21771.21,7799.38 U6.2
NetR13_1: R13.1 U5.6 | length 315.8
  Top Layer w15: U5.6 22124.41,8115 22266.46,7972.95 R13.1
NetR14_1: R14.1 U5.7 | length 176.1
  Top Layer w15: U5.7 22099.94,8167.5 22268.96,8167.5 R14.1
NetR15_2: R15.2 U5.2 | length 142.1
  Top Layer w15: R15.2 21840.59,8200 21875.59,8165 U5.2
NetR16_1: R16.1 U8.5 | length 255.9
  Top Layer w15: U8.5 20630,7906.61 20645,7921.61 20645,7926.21 20653.79,7935 20811.21,7935 20816,7930.22 20816,7892.55 R16.1
NetR17_2: U8.2
NetR18_1: R18.1 U7.6 | length 340.5
  Top Layer w15: U7.6 20996.85,8115 21193.25,7918.6 21193.25,7890.3 R18.1
NetR19_1: R19.1 U7.7 | length 168.6
  Top Layer w15: U7.7 21131.46,8165 R19.1
NetR20_2: R20.2 U7.2 | length 134.8
  Top Layer w15: R20.2 20654.92,8188.54 20678.47,8165 U7.2
VCC: "Input 36-12V 3A.1" C9.1 VR1.1 | length 793
  Top Layer w60: VR1.1 VR1.1@19901.14,6560.14
  Top Layer w70: 19449.72,6877.2 19449.72,6645.12 C9.1 19816.69,6635.39 19901.14,6550.94 VR1.1
pads on no net: BT1. BT2. BT3. BT4. U2.4 U4.4 U6.4 U8.4

## Polygon pours and split planes (outlines as drawn)
GND on Top Layer "NONET_L02_P-001" (solid, pour order 0): 19135,7800 20275,8940 24590,8940 25290,8240 25290,3840 24560,3110 20125,3110 19135,4100

## Silkscreen, mask and mechanical layers (free items; w line width, h text height)
Top Overlay:
  text "Bat4" at 22320,8825 h20
  text "Bat3" at 22420,8825 h20
  text "Bat2" at 22525,8825 h20
  text "Bat1" at 22630,8825 h20
  text "Abdulhakim" at 23580,8480 h150
  text "4.3V 2A Power Supply" at 19525.86,7808.28 h60 r45
  text "4-Cell Li-Ion 18650 Charger" at 19260.86,7748.28 h60 r45
  text "3.7-15V 0.8A Power Supply" at 19510.86,7578.28 h60 r45
  text "Regulated 5V 2A Input" at 19776.67,4385 h40 r90
  text "Voltmeter Module" at 23540,3275 h60
  text "Bat4" at 20630,3210 h20
  text "Bat3" at 20735,3210 h20
  text "Bat2" at 20840,3210 h20
  text "Bat1" at 20945,3210 h20
  text "Output Switch" at 20521.67,3180 h40 r90